# EAGLE board L1-Main (EAGLE 7.2.0)
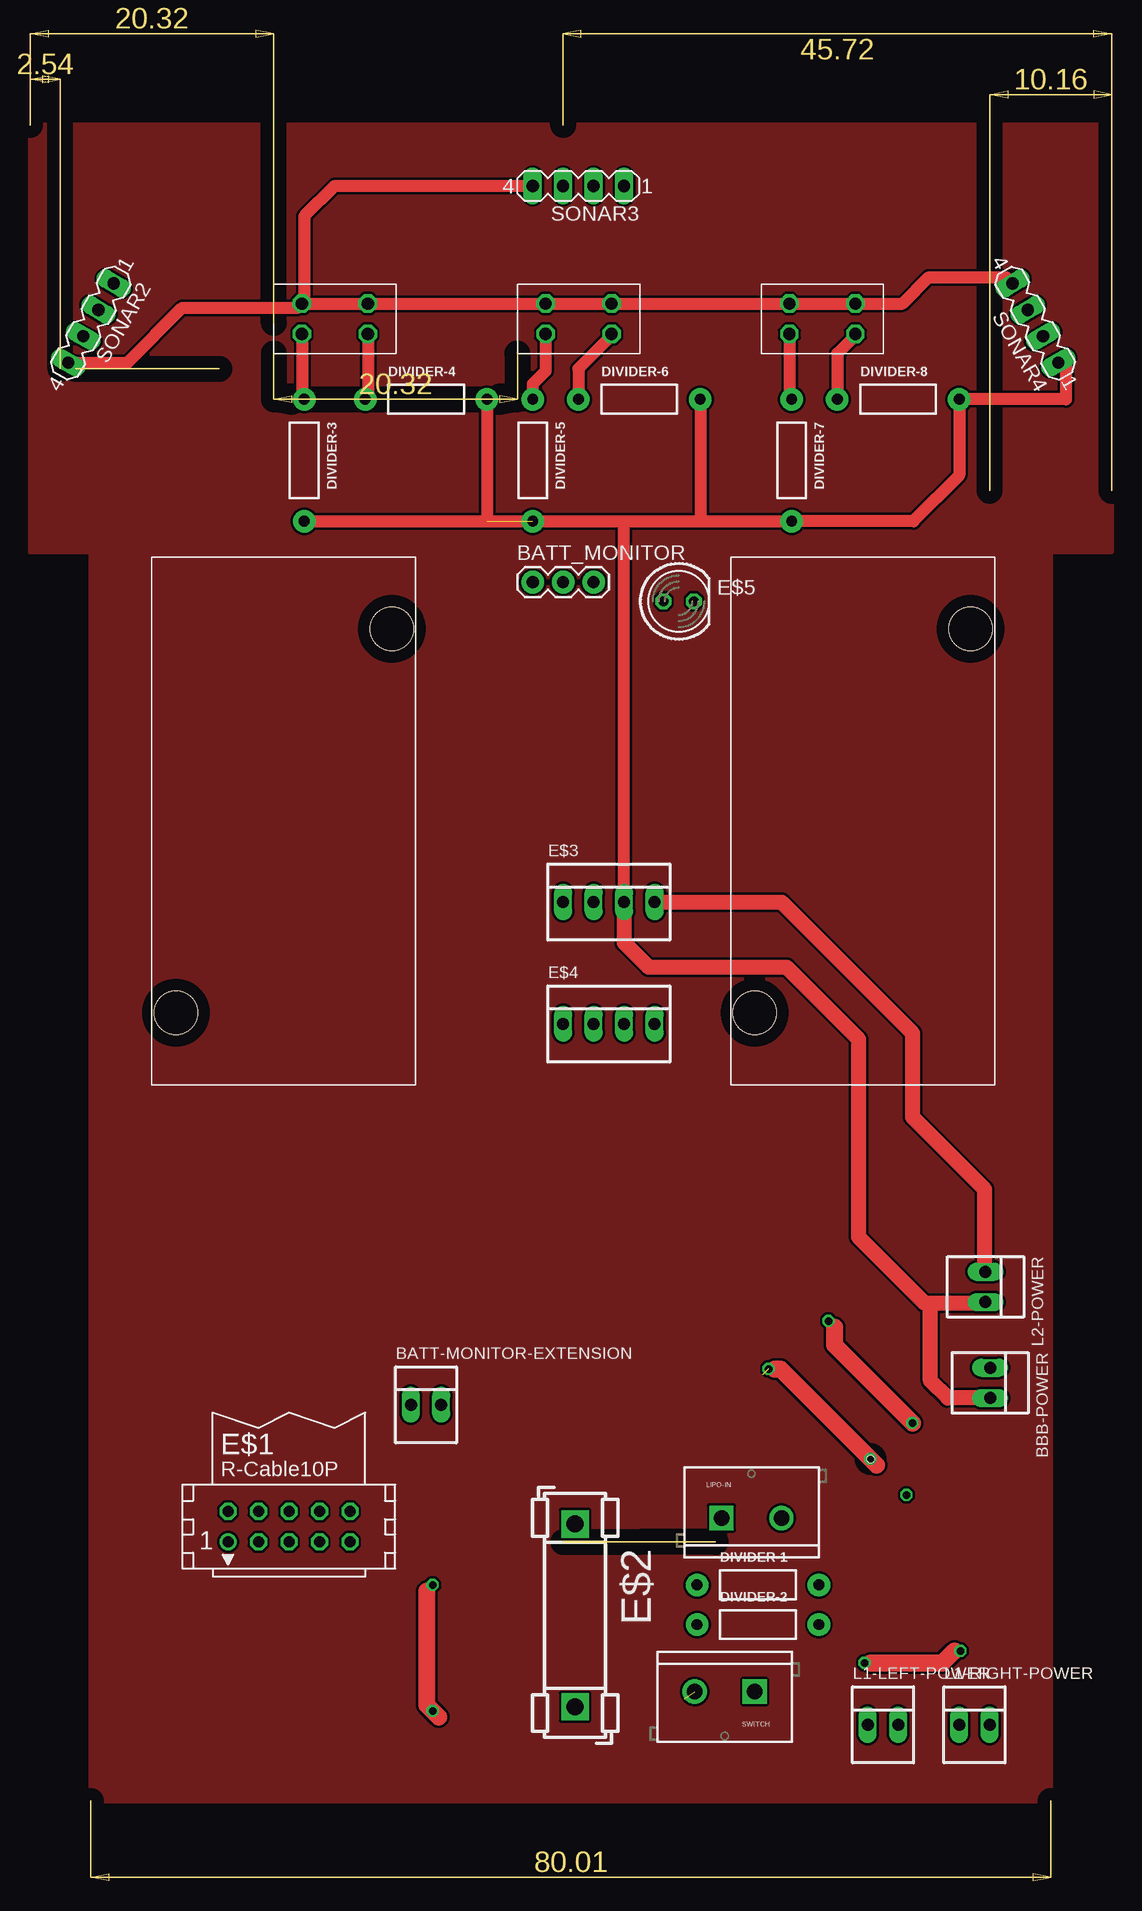
[diagram p0: board, top side]
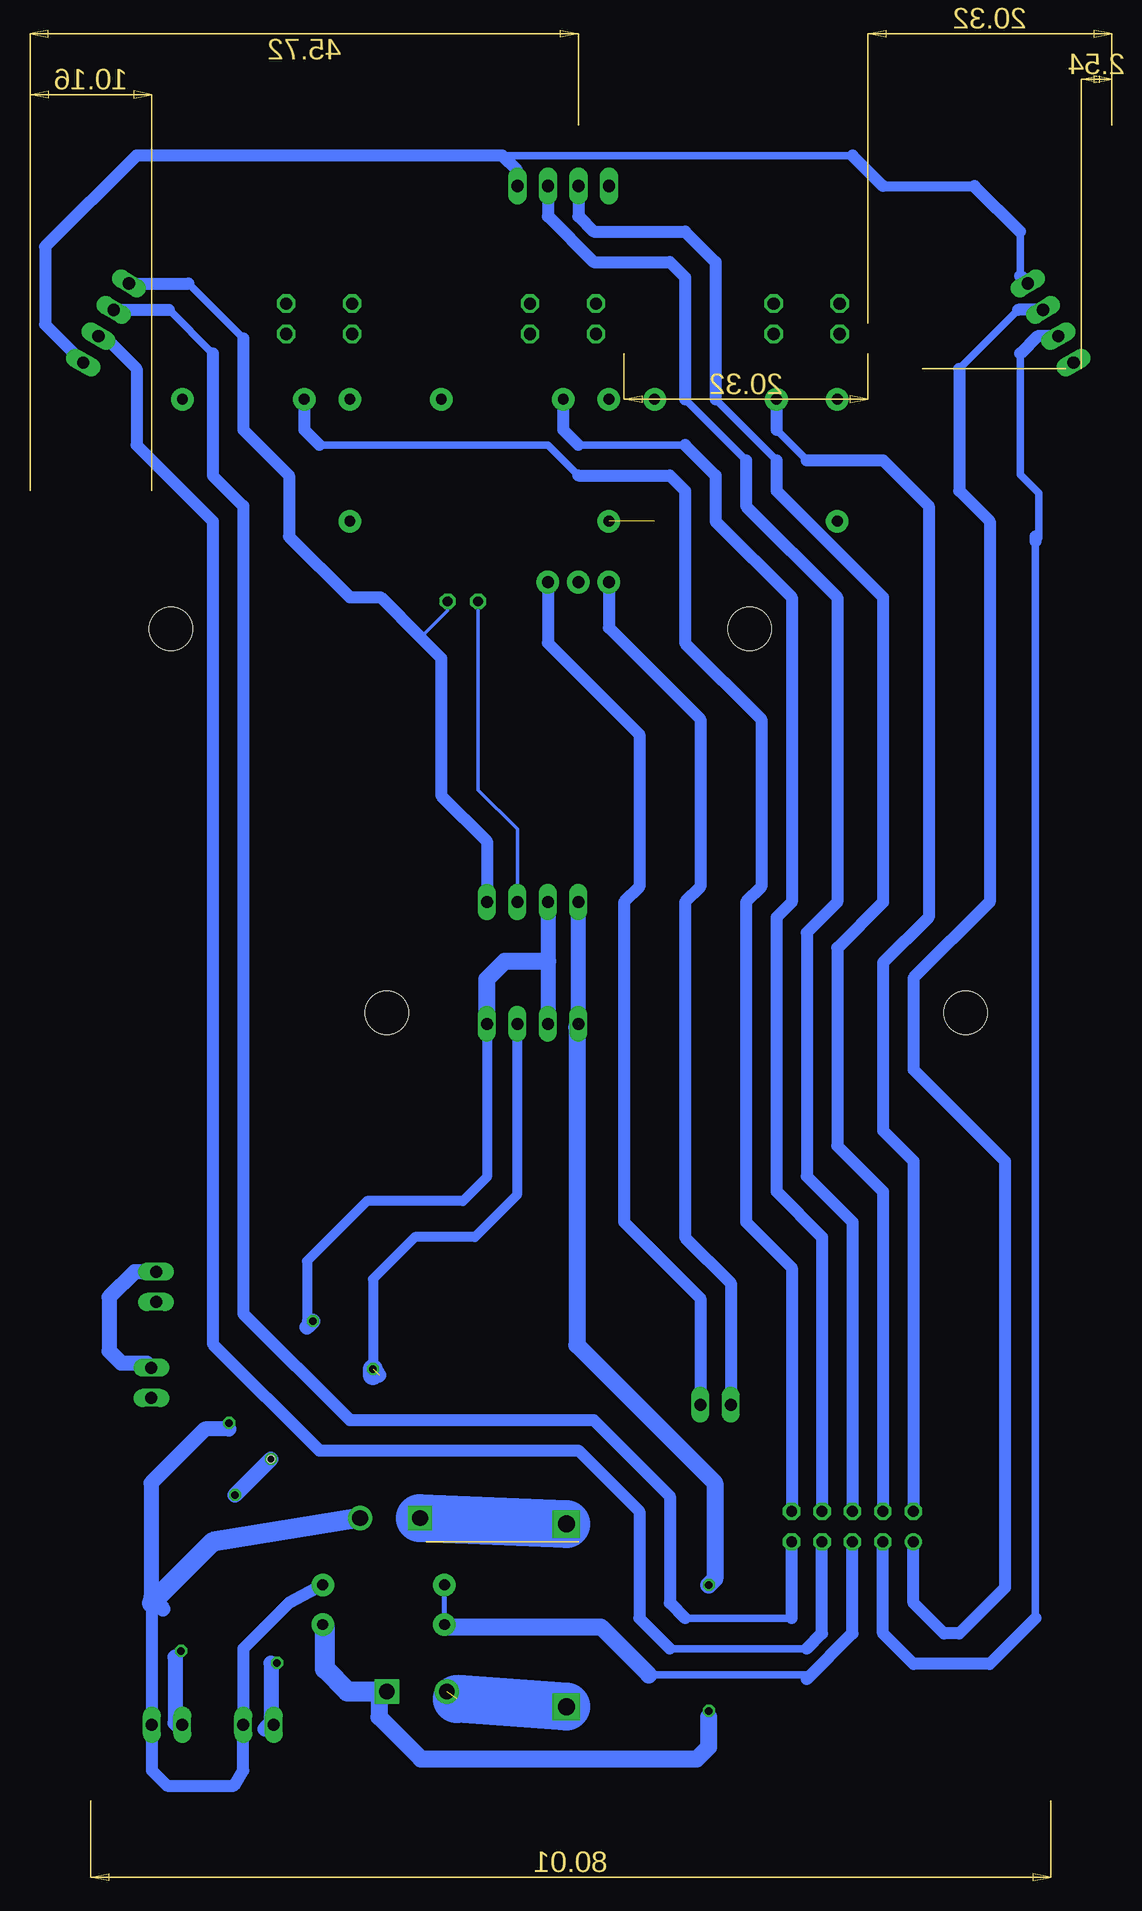
[diagram p1: board, bottom side, seen from below]

Size 90.17 x 154.27 mm. Coordinates in mm from the lower left corner, seen from the top.
Copper layers (1*16): Top 0.035mm / dielectric 1.5mm / Bottom 0.035mm
Design rules "default": minimum track width 10mil, minimum drill 24mil, track to track 8mil, track to pad 8mil, pad to pad 8mil, via to via 8mil, smd to smd 8mil, copper to edge 40mil, drill to drill 8mil, minimum pad ring 10mil, minimum via ring 8mil, stop-mask expansion 4mil, vias tented up to drill 0mil, thermal gap 10mil
Net classes: 0 default: clearance 0.205 mm
Holes 0.6 mm at 70.08,35.15

## Footprints (pad centres in the part's own frame; a part is rotated, then mirrored left to right if it is on the bottom)
22-23-2021 = drill 1 long: 1 -1.27,0; 2 1.27,0
1X03 = drill 1.016 pad 1.88: 1 0,0; 2 2.54,0; 3 5.08,0
AXIAL-0.4 = drill 0.9 pad 1.88: P$1 -5.08,0; P$2 5.08,0
CON10 = drill 0.914: 1 -5.08,-1.27 | drill 0.914 octagon: 2 -5.08,1.27; 3 -2.54,-1.27; 4 -2.54,1.27; 5 0,-1.27; 6 0,1.27; 7 2.54,-1.27; 8 2.54,1.27; 9 5.08,-1.27; 10 5.08,1.27
FUSE_HOLDER_5X20MM = drill 1.422 pad 2.286 square: 1 0,0; 2 15.24,0
22-23-2041 = drill 1 long: 1 -3.81,0; 2 -1.27,0; 3 1.27,0; 4 3.81,0
LED5MM = drill 0.813 octagon: A -1.27,0; K 1.27,0
SCREWTERMINAL-5MM-2 = drill 1.3 pad 2.032 square: 1 0,0 | drill 1.3 pad 2.032: 2 5,0
5V3A_REG = hole 3.6: 2,6; 20,38
MA04-1 = drill 1.016 long: 1 -3.81,0; 2 -1.27,0; 3 1.27,0; 4 3.81,0
TCRT = drill 1.016 octagon: 1 2.35,4.17; 2 7.85,4.17; 3 2.35,1.63; 4 7.85,1.63

## Placement (x,y rotation side)
BATT-MONITOR-EXTENSION  [22-23-2021]  33.02,39.67 0 top
BATT_MONITOR  [1X03]  41.91,108.25 0 top
BBB-POWER  [22-23-2021]  80.05,41.5 270 top
DIVIDER-1  [AXIAL-0.4]  60.69,24.66 0 top
DIVIDER-2  [AXIAL-0.4]  60.69,21.35 0 top
DIVIDER-3  [AXIAL-0.4]  22.86,118.41 270 top
DIVIDER-4  [AXIAL-0.4]  33.02,123.49 0 top
DIVIDER-5  [AXIAL-0.4]  41.91,118.41 270 top
DIVIDER-6  [AXIAL-0.4]  50.8,123.49 0 top
DIVIDER-7  [AXIAL-0.4]  63.5,118.41 270 top
DIVIDER-8  [AXIAL-0.4]  72.39,123.49 0 top
E$1  [CON10]  21.59,29.51 0 top
E$2  [FUSE_HOLDER_5X20MM]  45.45,29.74 270 top
E$3  [22-23-2041]  48.26,81.58 0 top
E$4  [22-23-2041]  48.26,71.42 0 top
E$5  [LED5MM]  54.08,106.65 0 top
L1-LEFT-POWER  [22-23-2021]  71.12,13 0 top
L1-RIGHT-POWER  [22-23-2021]  78.74,13 0 top
L2-POWER  [22-23-2021]  79.66,49.5 270 top
LIPO-IN  [SCREWTERMINAL-5MM-2]  57.65,30.24 0 top
REG_BBB  [5V3A_REG]  10.16,66.34 0 top
REG_EXT  [5V3A_REG]  58.42,66.34 0 top
SONAR2  [MA04-1]  5.08,129.84 240 top
SONAR3  [MA04-1]  45.72,141.27 180 top
SONAR4  [MA04-1]  83.82,129.84 120 top
SWITCH  [SCREWTERMINAL-5MM-2]  60.42,15.77 180 top
TCRT1  [TCRT]  20.32,127.3 0 top
TCRT2  [TCRT]  40.64,127.3 0 top
TCRT3  [TCRT]  60.96,127.3 0 top

## Library data of the parts
BATT-MONITOR-EXTENSION BBB-POWER E$3 E$4 L1-LEFT-POWER L1-RIGHT-POWER L2-POWER = con-molex
BATT_MONITOR LIPO-IN SWITCH = SparkFun-Connectors
DIVIDER-1-DIVIDER-8 = SparkFun-Passives
E$1 = con-harting
E$2 = fuse
E$5 = led
REG_BBB REG_EXT = 5V3ARegulator
SONAR2-SONAR4 = con-lstb
TCRT1-TCRT3 = tcrt

## Nets
S$2: E$2.1 LIPO-IN.1
S$3: E$2.2 SWITCH.2
S$4: DIVIDER-2.P$2 SWITCH.1
S$5: E$1.3 SONAR2.3
S$6: DIVIDER-1.P$2 L1-LEFT-POWER.2 L1-RIGHT-POWER.2 LIPO-IN.2
S$7: E$1.1 SONAR2.2
S$8: BBB-POWER.1 E$3.4 E$5.K L2-POWER.1 SONAR3.4 SONAR4.4 TCRT1.1 TCRT1.2 TCRT2.1 TCRT2.2 TCRT3.1 TCRT3.2
S$9: DIVIDER-3.P$1 TCRT1.3
S$10: DIVIDER-5.P$1 TCRT2.3
S$11: DIVIDER-7.P$1 TCRT3.3
S$12: BATT-MONITOR-EXTENSION.1 BATT_MONITOR.1
S$13: DIVIDER-4.P$1 E$1.2 TCRT1.4
S$14: DIVIDER-6.P$1 E$1.8 TCRT2.4
S$15: DIVIDER-8.P$1 E$1.10 TCRT3.4
S$16: BBB-POWER.2 DIVIDER-3.P$2 DIVIDER-4.P$2 DIVIDER-5.P$2 DIVIDER-6.P$2 DIVIDER-7.P$2 DIVIDER-8.P$2 E$3.3 E$5.A L2-POWER.2 SONAR2.1 SONAR3.1 SONAR4.1
S$17: BATT-MONITOR-EXTENSION.2 BATT_MONITOR.3
S$18: E$1.5
S$19: E$1.6 SONAR3.2
S$20: E$1.7 SONAR4.2
S$21: E$1.4 SONAR3.3
S$22: E$1.9 SONAR4.3
S$23: SONAR2.4
S$24: E$3.1 E$4.1
S$25: E$3.2 E$4.2 E$4.4
S$41: DIVIDER-1.P$1 DIVIDER-2.P$1

## Tracks (layer width: path | path; a pad name or v marks a point on that pad's centre or on a via)
S$1
  pour Top: 5.08,6.65 85.09,6.65 85.09,110.79 90.17,110.79 90.17,146.35 0,146.35 0,110.79 5.08,110.79
S$2
  Bottom 4: LIPO-IN.1 E$2.1
S$3  (1 unrouted)
  Bottom 4: E$2.2 54.58,15.15
S$4
  Bottom 1.676: SWITCH.1 63.7,15.77 65.58,17.65 65.58,21.16 DIVIDER-2.P$2
S$5
  Bottom 0.61: 6.35,21.89 6.35,111.65 6.08,111.92 6.08,115.65 7.62,117.19 7.62,127.3
  Bottom 1.016: 6.35,112.06 6.35,111.65 | 6.35,21.89 10.16,18.08 16.51,18.08 19.05,20.62 E$1.3 | SONAR2.3 6.18,128.74 7.62,127.3
S$6
  Bottom 1.016: DIVIDER-1.P$2 68.58,23.16 72.39,19.35 L1-LEFT-POWER.2 72.39,9.19 73.16,7.92 78.74,7.92 80.01,9.19 L1-RIGHT-POWER.2 80.01,23.16
  Bottom 1.676: LIPO-IN.2 74.93,28.24 80.01,23.16
S$7
  Bottom 0.61: 7.79,130.94 12.7,126.03
  Bottom 1.016: SONAR2.2 7.79,130.94 | 12.7,126.03 12.7,115.87 10.16,113.33 10.16,81.58 16.51,75.23 16.51,67.61 8.89,59.99 8.89,24.43 12.7,20.62 13.97,20.62 16.51,23.16 E$1.1
S$8
  Top 1.016: SONAR4.4 81.41,133.65 74.93,133.65 72.75,131.47 TCRT3.2 TCRT3.1 TCRT2.2 TCRT2.1 TCRT1.2 TCRT1.1 22.86,131.66 22.86,138.73 25.4,141.27 SONAR3.4
  Top 1.27: E$3.4 62.65,81.58 73.58,70.65 73.58,63.65 79.58,57.65 79.58,50.85 L2-POWER.1
  Bottom 0.305: E$5.K 55.35,105.88 57.6,103.62
  Bottom 0.406: 22.31,131.11 TCRT1.1
  Bottom 0.61: 76.96,133.14 72.39,128.57
  Bottom 1.016: SONAR4.4 76.96,133.14 | 72.39,128.57 72.39,120.95 68.58,117.14 68.58,112.06 63.5,106.98 60.96,106.98 57.6,103.62 55.88,101.9 55.88,90.47 52.07,86.66 E$3.4
  Bottom 1.27: L2-POWER.1 81.46,50.77 83.58,48.65 83.58,44.15 82.58,43.15 80.43,43.15 BBB-POWER.1
S$9
  Top 1.016: TCRT1.3 22.67,123.68 DIVIDER-3.P$1
S$10
  Top 1.016: TCRT2.3 42.99,125.84 41.91,124.76 DIVIDER-5.P$1
S$11
  Top 1.016: TCRT3.3 63.31,123.68 DIVIDER-7.P$1
S$12
  Bottom 1.016: BATT_MONITOR.1 41.91,104.44 34.29,96.82 34.29,82.85 35.56,81.58 35.56,53.64 31.75,49.83 BATT-MONITOR-EXTENSION.1
S$13
  Top 1.016: TCRT1.4 28.17,123.72 DIVIDER-4.P$1
  Bottom 0.61: 27.94,120.95 25.4,118.41
  Bottom 1.016: DIVIDER-4.P$1 27.94,120.95 | 25.4,118.41 19.05,118.41 15.24,114.6 15.24,80.31 19.05,76.5 19.05,62.53 16.51,59.99 E$1.2
S$14
  Top 1.016: TCRT2.4 48.49,128.8 45.72,126.03 DIVIDER-6.P$1
  Bottom 0.61: 44.45,119.68 35.56,119.68
  Bottom 1.016: DIVIDER-6.P$1 45.72,120.95 44.45,119.68 | 35.56,119.68 33.02,117.14 33.02,113.33 26.67,106.98 26.67,81.58 27.94,80.31 27.94,57.45 24.13,53.64 E$1.8
S$15
  Top 1.016: TCRT3.4 68.81,128.8 67.31,127.3 DIVIDER-8.P$1
  Bottom 0.61: 66.04,119.68 46.99,119.68 44.45,117.14
  Bottom 1.016: DIVIDER-8.P$1 67.31,120.95 66.04,119.68 | 44.45,117.14 36.83,117.14 35.56,115.87 35.56,103.17 29.21,96.82 29.21,82.85 30.48,81.58 30.48,54.91 26.67,51.1 E$1.10
S$16  (1 unrouted)
  Top 1.016: DIVIDER-3.P$2 38.1,113.33 | 38.1,113.33 49.53,113.33 | 49.53,113.33 55.88,113.33 | 55.88,113.33 DIVIDER-7.P$2 73.66,113.33 77.47,117.14 DIVIDER-8.P$2 86.36,123.49 86.36,126.54 SONAR4.1 | DIVIDER-4.P$2 38.1,113.33 | DIVIDER-6.P$2 55.88,113.33 | E$3.3 49.53,113.33
  Top 1.27: E$3.3 49.53,78.2 51.58,76.15 63.08,76.15 69.08,70.15 69.08,53.65 74.58,48.15 75.08,48.15 | 75.08,48.15 79.58,48.15 L2-POWER.2 | BBB-POWER.2 76.5,40.23 75.08,41.65 75.08,48.15
  Bottom 0.305: E$5.A 52.81,90.93 49.53,87.65 E$3.3
  Bottom 0.61: 21.59,143.81 50.8,143.81 | 7.62,137.46 7.62,133.78
  Bottom 0.813: 19.05,141.27 11.43,141.27
  Bottom 1.016: SONAR3.1 49.53,142.54 50.8,143.81 81.28,143.81 88.9,136.19 88.9,129.72 SONAR4.1 | 19.05,141.27 21.59,143.81 | 11.43,141.27 7.62,137.46 | 7.62,133.78 SONAR2.1
S$17
  Bottom 1.016: BATT_MONITOR.3 46.99,103.17 39.37,95.55 39.37,82.85 40.64,81.58 40.64,54.91 34.29,48.56 BATT-MONITOR-EXTENSION.2
S$18
  Bottom 1.016: 25.4,16.81 21.59,20.62 E$1.5
S$19
  Bottom 0.61: 35.56,123.49 30.48,118.41
  Bottom 1.016: SONAR3.2 46.99,138.73 43.18,134.92 36.83,134.92 35.56,133.65 35.56,123.49 | 30.48,118.41 30.48,114.6 22.86,106.98 22.86,81.58 25.4,79.04 25.4,58.72 21.59,54.91 E$1.6
S$20
  Bottom 0.61: 36.83,19.35 25.4,19.35
  Bottom 1.016: SONAR4.2 83.99,128.74 81.28,126.03 81.28,119.68 74.93,113.33 74.93,44.75 66.04,35.86 44.45,35.86 39.37,30.78 39.37,21.89 36.83,19.35 | 25.4,19.35 24.13,20.62 E$1.7
S$21
  Bottom 0.61: 33.02,123.49 27.94,118.41
  Bottom 1.016: SONAR3.3 44.45,138.73 43.18,137.46 35.56,137.46 33.02,134.92 33.02,123.49 | 27.94,118.41 27.94,115.87 19.05,106.98 19.05,81.58 22.86,77.77 22.86,61.26 19.05,57.45 E$1.4
S$22
  Bottom 0.61: 78.57,130.94 74.93,127.3 | 35.56,21.89 26.67,21.89
  Bottom 1.016: SONAR4.3 78.57,130.94 | 74.93,127.3 74.93,117.14 72.39,114.6 72.39,47.29 63.5,38.4 43.18,38.4 36.83,32.05 36.83,23.16 35.56,21.89 | 26.67,21.89 E$1.9
S$23
  Top 1.016: 22.31,131.11 12.7,131.11 8.13,126.54 SONAR2.4
S$24  (1 unrouted)
  Bottom 1.27: E$4.1 E$3.1
S$25
  Bottom 1.27: E$3.2 46.99,76.65 E$4.2
  Bottom 1.422: E$4.4 52.07,75.16 50.58,76.65 46.99,76.65
S$26  (via drill 0.6)
  other vias: 33.58,14.15
S$28  (via drill 0.6)
  other vias: 69.58,18.15
S$29
  Bottom 1.27: 66.58,46.65 67.08,46.15
S$30  (via drill 0.6)
  other vias: 77.58,19.15
S$31  (via drill 0.6, 0.6 pad 0.61)
  Bottom 1.27: v73.08,32.15 v70.08,35.15
S$32  (via drill 0.6)
  Top 1.422: 67.08,46.15 67.08,44.65 v73.58,38.15
S$33  (via drill 0.6)
  other vias: 66.58,46.65
S$34
  Bottom 1.27: 73.58,37.65 75.58,37.65 80.08,33.15 80.08,23.65 79.08,22.65
S$36  (via drill 0.6)  (1 unrouted)
  Bottom 0.813: 49.58,71.15 49.58,57.15 53.08,53.65 58.08,53.65 61.58,50.15 v61.58,42.65
  Bottom 1.27: 61.08,42.15 v61.58,42.65
  Bottom 1.676: 61.58,42.15 v61.58,42.65
S$37
  Bottom 1.27: 70.08,18.15 70.08,13.15 70.58,12.65
S$38
  Bottom 1.27: 78.08,18.65 78.08,13.15 77.58,12.65
S$40
  Bottom 0.813: 52.08,71.15 52.08,58.65 54.08,56.65 62.08,56.65 67.08,51.65 67.08,46.65
S$41
  Bottom 0.406: DIVIDER-2.P$1 DIVIDER-1.P$1
S$42
  Bottom 0.61: 38.58,17.15 25.58,17.15
  Bottom 1.422: 55.58,21.15 42.58,21.15 38.58,17.15
S$43
  Bottom 1.422: 61.08,15.65 61.08,13.65 57.58,10.15 34.58,10.15 33.58,11.15 33.58,13.65
S$44  (via drill 0.6)
  Bottom 1.422: 44.58,71.15 44.58,44.65 33.08,33.15 33.08,25.15 v33.58,24.65
S$45
  Top 1.422: 33.08,24.15 33.08,14.65 34.08,13.65
S$46
  Top 1.422: 62.08,42.65 62.58,42.65 70.58,34.65
S$47
  Top 1.422: 70.08,18.15 76.08,18.15 77.08,19.15